# Altium PCB Advanced Clock.PcbDoc (part 2 of 7)
Units mil, origin at the board's own origin, x right, y up, seen from the top; angles counter-clockwise.
Board outline 3854 x 3880 mil, 2 copper layers (Top Layer, Bottom Layer); 117 components, 90 nets, 504 pads, 209 vias.
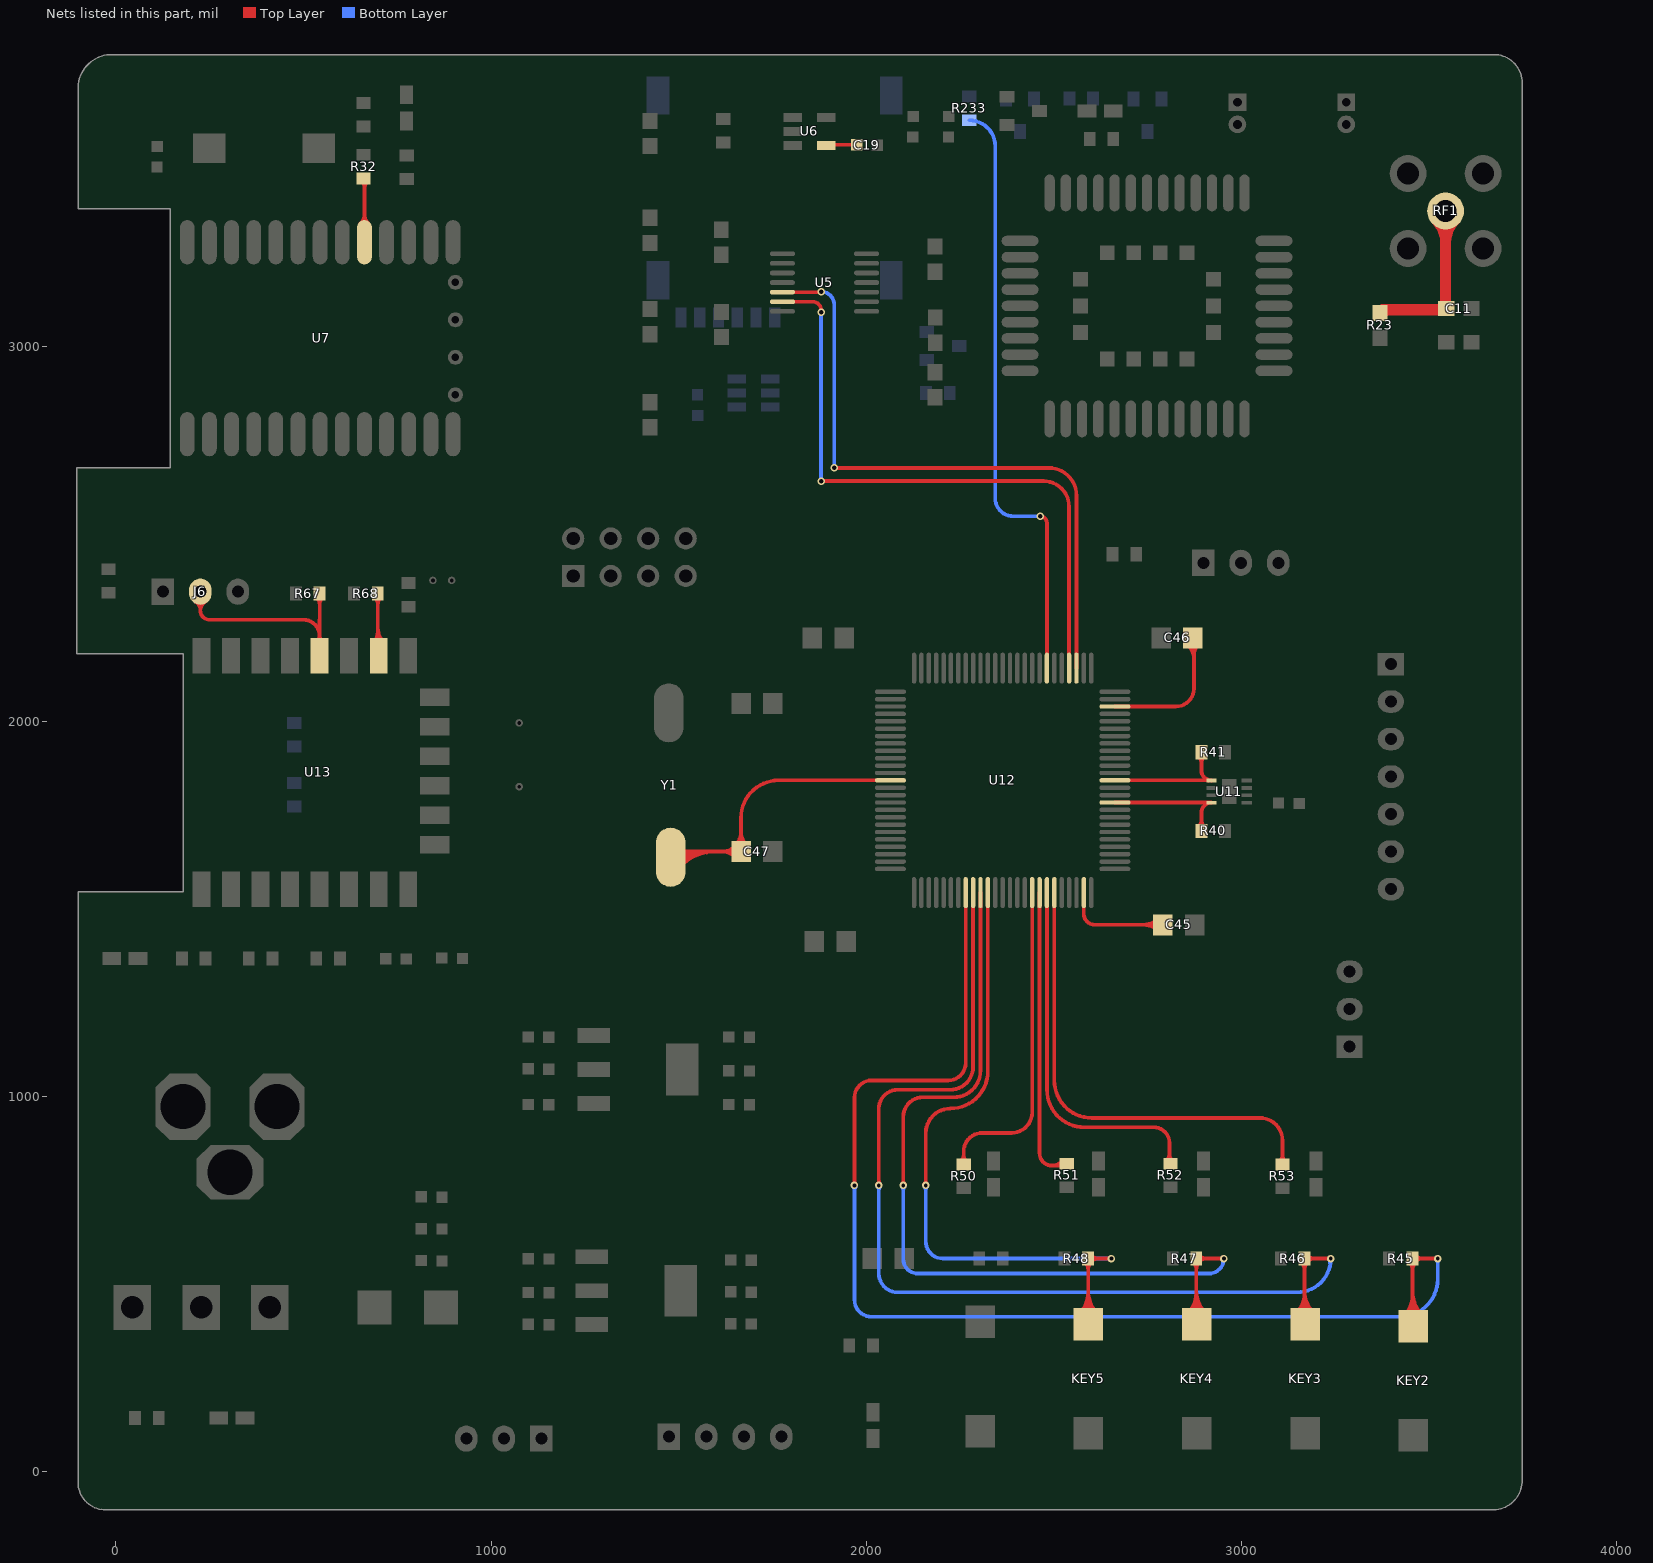
[diagram p2: the nets of this part, all layers, seen from the top]

## Via types
v1: diameter 20, hole 12, Top Layer to Bottom Layer, 133 vias
v2: diameter 20, hole 10, Top Layer to Bottom Layer, 30 vias
v3: diameter 15, hole 7, Top Layer to Bottom Layer, 26 vias
v4: diameter 30, hole 20, Top Layer to Bottom Layer, 11 vias
v5: diameter 138, hole 137.8, Top Layer to Bottom Layer, 4 vias
v6: diameter 50, hole 30, Top Layer to Bottom Layer, 4 vias
v7: diameter 40, hole 20, Top Layer to Bottom Layer, 1 vias

## Nets (pads, with @x,y where several pads share a name; then routed paths per layer and width w, separated by ;. In a path a pad name is that pad's centre, name@x,y a point inside that pad or via, vN(x,y) a via of type N, cw(c..) or ccw(c..) an arc to the next point about the centre after c; other vN are vias at no path point) (continued)
"GPIO 0": J6.2 R67.2 U13.4 | length 1435.2
  Top Layer w10: J6.2@225,2345 225,2295 ; U13.4@542.78,2174.13 542.78,2227.22 ; R67.2@542.99,2340 542.99,2270 542.78,2270 542.78,2227.22 ; J6.2@211.79,2318.77 cw(c197,2295) 225,2295 ; J6.2@211.79,2318.77 cw(c197,2295) 225,2295 ; J6.2@211.79,2318.77 cw(c197,2295) 225,2295 ; J6.2@211.79,2318.77 cw(c197,2295) 225,2295 ; J6.2@211.79,2318.77 cw(c197,2295) 225,2295 ; 225,2295 cw(c253,2295) J6.2@238.21,2318.77 ; 225,2295 cw(c253,2295) J6.2@238.21,2318.77 ; 225,2295 cw(c253,2295) J6.2@238.21,2318.77 ; 225,2295 cw(c253,2295) J6.2@238.21,2318.77 ; 225,2295 cw(c253,2295) J6.2@238.21,2318.77 ; 225,2295 ccw(c250,2295) 250,2270 500,2270 cw(c500,2227.22) 542.78,2227.22 ; U13.4@534.79,2214.57 ccw(c528.77,2227.22) 542.78,2227.22 ; U13.4@534.79,2214.57 ccw(c528.77,2227.22) 542.78,2227.22 ; U13.4@534.79,2214.57 ccw(c528.77,2227.22) 542.78,2227.22 ; U13.4@534.79,2214.57 ccw(c528.77,2227.22) 542.78,2227.22 ; U13.4@534.79,2214.57 ccw(c528.77,2227.22) 542.78,2227.22 ; U13.4@534.79,2214.57 ccw(c528.77,2227.22) 542.78,2227.22 ; U13.4@534.79,2214.57 ccw(c528.77,2227.22) 542.78,2227.22 ; U13.4@534.79,2214.57 ccw(c528.77,2227.22) 542.78,2227.22 ; R67.2@535.39,2329.15 cw(c517.04,2310.8) 542.99,2310.8 ; R67.2@535.39,2329.15 cw(c517.04,2310.8) 542.99,2310.8 ; R67.2@535.39,2329.15 cw(c517.04,2310.8) 542.99,2310.8 ; R67.2@535.39,2329.15 cw(c517.04,2310.8) 542.99,2310.8 ; R67.2@535.39,2329.15 cw(c517.04,2310.8) 542.99,2310.8 ; R67.2@535.39,2329.15 cw(c517.04,2310.8) 542.99,2310.8 ; R67.2@535.39,2329.15 cw(c517.04,2310.8) 542.99,2310.8 ; R67.2@535.39,2329.15 cw(c517.04,2310.8) 542.99,2310.8 ; 542.78,2227.22 ccw(c556.79,2227.22) U13.4@550.77,2214.57 ; 542.78,2227.22 ccw(c556.79,2227.22) U13.4@550.77,2214.57 ; 542.78,2227.22 ccw(c556.79,2227.22) U13.4@550.77,2214.57 ; 542.78,2227.22 ccw(c556.79,2227.22) U13.4@550.77,2214.57 ; 542.78,2227.22 ccw(c556.79,2227.22) U13.4@550.77,2214.57 ; 542.78,2227.22 ccw(c556.79,2227.22) U13.4@550.77,2214.57 ; 542.78,2227.22 ccw(c556.79,2227.22) U13.4@550.77,2214.57 ; 542.78,2227.22 ccw(c556.79,2227.22) U13.4@550.77,2214.57 ; 542.99,2310.8 cw(c568.94,2310.8) R67.2@550.59,2329.15 ; 542.99,2310.8 cw(c568.94,2310.8) R67.2@550.59,2329.15 ; 542.99,2310.8 cw(c568.94,2310.8) R67.2@550.59,2329.15 ; 542.99,2310.8 cw(c568.94,2310.8) R67.2@550.59,2329.15 ; 542.99,2310.8 cw(c568.94,2310.8) R67.2@550.59,2329.15 ; 542.99,2310.8 cw(c568.94,2310.8) R67.2@550.59,2329.15 ; 542.99,2310.8 cw(c568.94,2310.8) R67.2@550.59,2329.15 ; 542.99,2310.8 cw(c568.94,2310.8) R67.2@550.59,2329.15
"GPIO 15": R68.2 U13.2 | length 961.2
  Top Layer w10: R68.2@697.99,2340 697.99,2176.39 ccw(c700.26,2176.39) U13.2@700.26,2174.13 ccw(c700.26,2175.86) U13.2@701.99,2175.86 ; U13.2@687.09,2210.92 ccw(c660.78,2237.23) 697.99,2237.23 ; U13.2@687.09,2210.92 ccw(c660.78,2237.23) 697.99,2237.23 ; U13.2@687.09,2210.92 ccw(c660.78,2237.23) 697.99,2237.23 ; U13.2@687.09,2210.92 ccw(c660.78,2237.23) 697.99,2237.23 ; U13.2@687.09,2210.92 ccw(c660.78,2237.23) 697.99,2237.23 ; R68.2@690.39,2329.15 cw(c672.04,2310.8) 697.99,2310.8 ; R68.2@690.39,2329.15 cw(c672.04,2310.8) 697.99,2310.8 ; R68.2@690.39,2329.15 cw(c672.04,2310.8) 697.99,2310.8 ; R68.2@690.39,2329.15 cw(c672.04,2310.8) 697.99,2310.8 ; R68.2@690.39,2329.15 cw(c672.04,2310.8) 697.99,2310.8 ; R68.2@690.39,2329.15 cw(c672.04,2310.8) 697.99,2310.8 ; R68.2@690.39,2329.15 cw(c672.04,2310.8) 697.99,2310.8 ; R68.2@690.39,2329.15 cw(c672.04,2310.8) 697.99,2310.8 ; 697.99,2224.04 ccw(c726.55,2224.04) U13.2@706.36,2203.84 ; 697.99,2224.04 ccw(c726.55,2224.04) U13.2@706.36,2203.84 ; 697.99,2224.04 ccw(c726.55,2224.04) U13.2@706.36,2203.84 ; 697.99,2224.04 ccw(c726.55,2224.04) U13.2@706.36,2203.84 ; 697.99,2224.04 ccw(c726.55,2224.04) U13.2@706.36,2203.84 ; 697.99,2248.18 ccw(c750.69,2248.18) U13.2@713.43,2210.92 ; 697.99,2248.18 ccw(c750.69,2248.18) U13.2@713.43,2210.92 ; 697.99,2248.18 ccw(c750.69,2248.18) U13.2@713.43,2210.92 ; 697.99,2248.18 ccw(c750.69,2248.18) U13.2@713.43,2210.92 ; 697.99,2248.18 ccw(c750.69,2248.18) U13.2@713.43,2210.92 ; 697.99,2310.8 cw(c723.94,2310.8) R68.2@705.59,2329.15 ; 697.99,2310.8 cw(c723.94,2310.8) R68.2@705.59,2329.15 ; 697.99,2310.8 cw(c723.94,2310.8) R68.2@705.59,2329.15 ; 697.99,2310.8 cw(c723.94,2310.8) R68.2@705.59,2329.15 ; 697.99,2310.8 cw(c723.94,2310.8) R68.2@705.59,2329.15 ; 697.99,2310.8 cw(c723.94,2310.8) R68.2@705.59,2329.15 ; 697.99,2310.8 cw(c723.94,2310.8) R68.2@705.59,2329.15 ; 697.99,2310.8 cw(c723.94,2310.8) R68.2@705.59,2329.15
IIC_SCL: R40.1 U11.4 U12.60 | length 673.5
  Top Layer w10: U12.60@2663.21,1782.94 U11.4@2920.08,1782.94 ; R40.1@2894,1707 2894,1755.72 cw(c2920.65,1755.72) U11.4@2920.65,1782.38 ; R40.1@2886.4,1717.85 ccw(c2868.05,1736.2) 2894,1736.2 ; R40.1@2886.4,1717.85 ccw(c2868.05,1736.2) 2894,1736.2 ; R40.1@2886.4,1717.85 ccw(c2868.05,1736.2) 2894,1736.2 ; R40.1@2886.4,1717.85 ccw(c2868.05,1736.2) 2894,1736.2 ; R40.1@2886.4,1717.85 ccw(c2868.05,1736.2) 2894,1736.2 ; R40.1@2886.4,1717.85 ccw(c2868.05,1736.2) 2894,1736.2 ; R40.1@2886.4,1717.85 ccw(c2868.05,1736.2) 2894,1736.2 ; R40.1@2886.4,1717.85 ccw(c2868.05,1736.2) 2894,1736.2 ; 2894,1736.2 ccw(c2919.95,1736.2) R40.1@2901.6,1717.85 ; 2894,1736.2 ccw(c2919.95,1736.2) R40.1@2901.6,1717.85 ; 2894,1736.2 ccw(c2919.95,1736.2) R40.1@2901.6,1717.85 ; 2894,1736.2 ccw(c2919.95,1736.2) R40.1@2901.6,1717.85 ; 2894,1736.2 ccw(c2919.95,1736.2) R40.1@2901.6,1717.85 ; 2894,1736.2 ccw(c2919.95,1736.2) R40.1@2901.6,1717.85 ; 2894,1736.2 ccw(c2919.95,1736.2) R40.1@2901.6,1717.85 ; 2894,1736.2 ccw(c2919.95,1736.2) R40.1@2901.6,1717.85
IIC_SDA: R41.1 U11.1 U12.63 | length 679.7
  Top Layer w10: U12.63@2663.21,1842 U11.1@2915.2,1842 ; R41.1@2894,1917 2894,1868.1 ccw(c2920.66,1868.1) U11.1@2915.2,1842 ; U11.1@2920.66,1841.43 2920.1,1842 U11.1@2915.2,1842 ; R41.1@2886.4,1906.15 cw(c2868.05,1887.8) 2894,1887.8 ; R41.1@2886.4,1906.15 cw(c2868.05,1887.8) 2894,1887.8 ; R41.1@2886.4,1906.15 cw(c2868.05,1887.8) 2894,1887.8 ; R41.1@2886.4,1906.15 cw(c2868.05,1887.8) 2894,1887.8 ; R41.1@2886.4,1906.15 cw(c2868.05,1887.8) 2894,1887.8 ; R41.1@2886.4,1906.15 cw(c2868.05,1887.8) 2894,1887.8 ; R41.1@2886.4,1906.15 cw(c2868.05,1887.8) 2894,1887.8 ; R41.1@2886.4,1906.15 cw(c2868.05,1887.8) 2894,1887.8 ; 2894,1887.8 cw(c2919.95,1887.8) R41.1@2901.6,1906.15 ; 2894,1887.8 cw(c2919.95,1887.8) R41.1@2901.6,1906.15 ; 2894,1887.8 cw(c2919.95,1887.8) R41.1@2901.6,1906.15 ; 2894,1887.8 cw(c2919.95,1887.8) R41.1@2901.6,1906.15 ; 2894,1887.8 cw(c2919.95,1887.8) R41.1@2901.6,1906.15 ; 2894,1887.8 cw(c2919.95,1887.8) R41.1@2901.6,1906.15 ; 2894,1887.8 cw(c2919.95,1887.8) R41.1@2901.6,1906.15 ; 2894,1887.8 cw(c2919.95,1887.8) R41.1@2901.6,1906.15 ; U11.1@2908.5,1845.39 cw(c2905.44,1839.34) 2911.88,1841.46 ccw(c2905.44,1839.34) U11.1@2908.5,1845.39
KEY: R32.2 U7.18 | length 776.1
  Top Layer w10: R32.2@660,3447.01 cw(c660,3444.57) 662.44,3444.57 U7.18@662.44,3276.81 ; U7.18@652.06,3326.56 ccw(c626.99,3351.63) 662.44,3351.63 ; U7.18@652.06,3326.56 ccw(c626.99,3351.63) 662.44,3351.63 ; U7.18@652.06,3326.56 ccw(c626.99,3351.63) 662.44,3351.63 ; U7.18@652.06,3326.56 ccw(c626.99,3351.63) 662.44,3351.63 ; U7.18@652.06,3326.56 ccw(c626.99,3351.63) 662.44,3351.63 ; R32.2@655.65,3439.41 cw(c639.25,3423.01) 662.44,3423.01 ; R32.2@655.65,3439.41 cw(c639.25,3423.01) 662.44,3423.01 ; R32.2@655.65,3439.41 cw(c639.25,3423.01) 662.44,3423.01 ; R32.2@655.65,3439.41 cw(c639.25,3423.01) 662.44,3423.01 ; R32.2@655.65,3439.41 cw(c639.25,3423.01) 662.44,3423.01 ; R32.2@655.65,3439.41 cw(c639.25,3423.01) 662.44,3423.01 ; R32.2@655.65,3439.41 cw(c639.25,3423.01) 662.44,3423.01 ; R32.2@655.65,3439.41 cw(c639.25,3423.01) 662.44,3423.01 ; 662.44,3351.63 ccw(c697.89,3351.63) U7.18@672.82,3326.56 ; 662.44,3351.63 ccw(c697.89,3351.63) U7.18@672.82,3326.56 ; 662.44,3351.63 ccw(c697.89,3351.63) U7.18@672.82,3326.56 ; 662.44,3351.63 ccw(c697.89,3351.63) U7.18@672.82,3326.56 ; 662.44,3351.63 ccw(c697.89,3351.63) U7.18@672.82,3326.56 ; 662.44,3419.11 cw(c691.14,3419.11) R32.2@670.85,3439.41 ; 662.44,3419.11 cw(c691.14,3419.11) R32.2@670.85,3439.41 ; 662.44,3419.11 cw(c691.14,3419.11) R32.2@670.85,3439.41 ; 662.44,3419.11 cw(c691.14,3419.11) R32.2@670.85,3439.41 ; 662.44,3419.11 cw(c691.14,3419.11) R32.2@670.85,3439.41 ; 662.44,3419.11 cw(c691.14,3419.11) R32.2@670.85,3439.41 ; 662.44,3419.11 cw(c691.14,3419.11) R32.2@670.85,3439.41 ; 662.44,3419.11 cw(c691.14,3419.11) R32.2@670.85,3439.41
KEY2: KEY5.1 R48.2 U12.36 | length 4155.8
  Top Layer w10: v2(2159,762) 2159,901.37 cw(c2224.63,901.37) 2224.63,967 ccw(c2224.63,1067) 2324.63,1067 U12.36@2324.63,1542.79 ; KEY5.1@2592.75,392 cw(c2592.75,392.76) 2591.99,392.76 R48.2@2591.99,567 v2(2654,567) ; v2@2155.46,765.54 ccw(c2146.93,774.07) 2159,774.07 ; v2@2155.46,765.54 ccw(c2146.93,774.07) 2159,774.07 ; v2@2155.46,765.54 ccw(c2146.93,774.07) 2159,774.07 ; v2@2155.46,765.54 ccw(c2146.93,774.07) 2159,774.07 ; v2@2155.46,765.54 ccw(c2146.93,774.07) 2159,774.07 ; v2@2155.46,765.54 ccw(c2146.93,774.07) 2159,774.07 ; v2@2155.46,765.54 ccw(c2146.93,774.07) 2159,774.07 ; v2@2155.46,765.54 ccw(c2146.93,774.07) 2159,774.07 ; 2159,774.07 ccw(c2171.07,774.07) v2@2162.54,765.54 ; 2159,774.07 ccw(c2171.07,774.07) v2@2162.54,765.54 ; 2159,774.07 ccw(c2171.07,774.07) v2@2162.54,765.54 ; 2159,774.07 ccw(c2171.07,774.07) v2@2162.54,765.54 ; 2159,774.07 ccw(c2171.07,774.07) v2@2162.54,765.54 ; 2159,774.07 ccw(c2171.07,774.07) v2@2162.54,765.54 ; 2159,774.07 ccw(c2171.07,774.07) v2@2162.54,765.54 ; 2159,774.07 ccw(c2171.07,774.07) v2@2162.54,765.54 ; KEY5.1@2568.45,420.24 ccw(c2511.6,477.08) 2591.99,477.08 ; KEY5.1@2568.45,420.24 ccw(c2511.6,477.08) 2591.99,477.08 ; KEY5.1@2568.45,420.24 ccw(c2511.6,477.08) 2591.99,477.08 ; KEY5.1@2568.45,420.24 ccw(c2511.6,477.08) 2591.99,477.08 ; KEY5.1@2568.45,420.24 ccw(c2511.6,477.08) 2591.99,477.08 ; KEY5.1@2575.52,413.17 ccw(c2535.75,452.94) 2591.99,452.94 ; KEY5.1@2575.52,413.17 ccw(c2535.75,452.94) 2591.99,452.94 ; KEY5.1@2575.52,413.17 ccw(c2535.75,452.94) 2591.99,452.94 ; KEY5.1@2575.52,413.17 ccw(c2535.75,452.94) 2591.99,452.94 ; KEY5.1@2575.52,413.17 ccw(c2535.75,452.94) 2591.99,452.94 ; R48.2@2584.39,556.15 cw(c2566.04,537.8) 2591.99,537.8 ; R48.2@2584.39,556.15 cw(c2566.04,537.8) 2591.99,537.8 ; R48.2@2584.39,556.15 cw(c2566.04,537.8) 2591.99,537.8 ; R48.2@2584.39,556.15 cw(c2566.04,537.8) 2591.99,537.8 ; R48.2@2584.39,556.15 cw(c2566.04,537.8) 2591.99,537.8 ; R48.2@2584.39,556.15 cw(c2566.04,537.8) 2591.99,537.8 ; R48.2@2584.39,556.15 cw(c2566.04,537.8) 2591.99,537.8 ; R48.2@2584.39,556.15 cw(c2566.04,537.8) 2591.99,537.8 ; 2591.99,456.6 ccw(c2653.41,456.6) KEY5.1@2609.98,413.17 ; 2591.99,456.6 ccw(c2653.41,456.6) KEY5.1@2609.98,413.17 ; 2591.99,456.6 ccw(c2653.41,456.6) KEY5.1@2609.98,413.17 ; 2591.99,456.6 ccw(c2653.41,456.6) KEY5.1@2609.98,413.17 ; 2591.99,456.6 ccw(c2653.41,456.6) KEY5.1@2609.98,413.17 ; 2591.99,480.74 ccw(c2677.56,480.74) KEY5.1@2617.05,420.24 ; 2591.99,480.74 ccw(c2677.56,480.74) KEY5.1@2617.05,420.24 ; 2591.99,480.74 ccw(c2677.56,480.74) KEY5.1@2617.05,420.24 ; 2591.99,480.74 ccw(c2677.56,480.74) KEY5.1@2617.05,420.24 ; 2591.99,480.74 ccw(c2677.56,480.74) KEY5.1@2617.05,420.24 ; 2591.99,537.8 cw(c2617.94,537.8) R48.2@2599.59,556.15 ; 2591.99,537.8 cw(c2617.94,537.8) R48.2@2599.59,556.15 ; 2591.99,537.8 cw(c2617.94,537.8) R48.2@2599.59,556.15 ; 2591.99,537.8 cw(c2617.94,537.8) R48.2@2599.59,556.15 ; 2591.99,537.8 cw(c2617.94,537.8) R48.2@2599.59,556.15 ; 2591.99,537.8 cw(c2617.94,537.8) R48.2@2599.59,556.15 ; 2591.99,537.8 cw(c2617.94,537.8) R48.2@2599.59,556.15 ; 2591.99,537.8 cw(c2617.94,537.8) R48.2@2599.59,556.15 ; R48.2@2599.59,559.4 cw(c2617.94,541.05) 2617.94,567 ; R48.2@2599.59,559.4 cw(c2617.94,541.05) 2617.94,567 ; R48.2@2599.59,559.4 cw(c2617.94,541.05) 2617.94,567 ; R48.2@2599.59,559.4 cw(c2617.94,541.05) 2617.94,567 ; R48.2@2599.59,559.4 cw(c2617.94,541.05) 2617.94,567 ; R48.2@2599.59,559.4 cw(c2617.94,541.05) 2617.94,567 ; R48.2@2599.59,559.4 cw(c2617.94,541.05) 2617.94,567 ; R48.2@2599.59,559.4 cw(c2617.94,541.05) 2617.94,567 ; R48.2@2599.59,574.6 ccw(c2617.94,592.95) 2617.94,567 ; R48.2@2599.59,574.6 ccw(c2617.94,592.95) 2617.94,567 ; R48.2@2599.59,574.6 ccw(c2617.94,592.95) 2617.94,567 ; R48.2@2599.59,574.6 ccw(c2617.94,592.95) 2617.94,567 ; R48.2@2599.59,574.6 ccw(c2617.94,592.95) 2617.94,567 ; R48.2@2599.59,574.6 ccw(c2617.94,592.95) 2617.94,567 ; R48.2@2599.59,574.6 ccw(c2617.94,592.95) 2617.94,567 ; R48.2@2599.59,574.6 ccw(c2617.94,592.95) 2617.94,567 ; 2641.93,567 cw(c2641.93,554.93) v2@2650.46,563.46 ; 2641.93,567 ccw(c2641.93,579.07) v2@2650.46,570.54 ; 2641.93,567 cw(c2641.93,554.93) v2@2650.46,563.46 ; 2641.93,567 ccw(c2641.93,579.07) v2@2650.46,570.54 ; 2641.93,567 cw(c2641.93,554.93) v2@2650.46,563.46 ; 2641.93,567 ccw(c2641.93,579.07) v2@2650.46,570.54 ; 2641.93,567 cw(c2641.93,554.93) v2@2650.46,563.46 ; 2641.93,567 ccw(c2641.93,579.07) v2@2650.46,570.54 ; 2641.93,567 cw(c2641.93,554.93) v2@2650.46,563.46 ; 2641.93,567 ccw(c2641.93,579.07) v2@2650.46,570.54 ; 2641.93,567 cw(c2641.93,554.93) v2@2650.46,563.46 ; 2641.93,567 ccw(c2641.93,579.07) v2@2650.46,570.54 ; 2641.93,567 cw(c2641.93,554.93) v2@2650.46,563.46 ; 2641.93,567 ccw(c2641.93,579.07) v2@2650.46,570.54 ; 2641.93,567 cw(c2641.93,554.93) v2@2650.46,563.46 ; 2641.93,567 ccw(c2641.93,579.07) v2@2650.46,570.54
  Bottom Layer w10: v2(2159,762) 2159,612.81 ccw(c2204.81,612.81) 2204.81,567 v2(2654,567) ; v2@2155.46,758.46 cw(c2146.93,749.93) 2159,749.93 ; v2@2155.46,758.46 cw(c2146.93,749.93) 2159,749.93 ; v2@2155.46,758.46 cw(c2146.93,749.93) 2159,749.93 ; v2@2155.46,758.46 cw(c2146.93,749.93) 2159,749.93 ; v2@2155.46,758.46 cw(c2146.93,749.93) 2159,749.93 ; v2@2155.46,758.46 cw(c2146.93,749.93) 2159,749.93 ; v2@2155.46,758.46 cw(c2146.93,749.93) 2159,749.93 ; v2@2155.46,758.46 cw(c2146.93,749.93) 2159,749.93 ; 2159,749.93 cw(c2171.07,749.93) v2@2162.54,758.46 ; 2159,749.93 cw(c2171.07,749.93) v2@2162.54,758.46 ; 2159,749.93 cw(c2171.07,749.93) v2@2162.54,758.46 ; 2159,749.93 cw(c2171.07,749.93) v2@2162.54,758.46 ; 2159,749.93 cw(c2171.07,749.93) v2@2162.54,758.46 ; 2159,749.93 cw(c2171.07,749.93) v2@2162.54,758.46 ; 2159,749.93 cw(c2171.07,749.93) v2@2162.54,758.46 ; 2159,749.93 cw(c2171.07,749.93) v2@2162.54,758.46 ; 2641.93,567 cw(c2641.93,554.93) v2@2650.46,563.46 ; 2641.93,567 ccw(c2641.93,579.07) v2@2650.46,570.54 ; 2641.93,567 cw(c2641.93,554.93) v2@2650.46,563.46 ; 2641.93,567 ccw(c2641.93,579.07) v2@2650.46,570.54 ; 2641.93,567 cw(c2641.93,554.93) v2@2650.46,563.46 ; 2641.93,567 ccw(c2641.93,579.07) v2@2650.46,570.54 ; 2641.93,567 cw(c2641.93,554.93) v2@2650.46,563.46 ; 2641.93,567 ccw(c2641.93,579.07) v2@2650.46,570.54 ; 2641.93,567 cw(c2641.93,554.93) v2@2650.46,563.46 ; 2641.93,567 ccw(c2641.93,579.07) v2@2650.46,570.54 ; 2641.93,567 cw(c2641.93,554.93) v2@2650.46,563.46 ; 2641.93,567 ccw(c2641.93,579.07) v2@2650.46,570.54 ; 2641.93,567 cw(c2641.93,554.93) v2@2650.46,563.46 ; 2641.93,567 ccw(c2641.93,579.07) v2@2650.46,570.54 ; 2641.93,567 cw(c2641.93,554.93) v2@2650.46,563.46 ; 2641.93,567 ccw(c2641.93,579.07) v2@2650.46,570.54
KEY3: KEY4.1 R47.2 U12.35 | length 4595
  Top Layer w10: v2(2099,762) 2099,944.68 cw(c2151.32,944.68) 2151.32,997 2234,997 ccw(c2234,1067.94) 2304.94,1067.94 U12.35@2304.94,1542.79 ; KEY4.1@2881.5,392 cw(c2881.5,393.17) 2880.33,393.17 R47.2@2880.33,567 v2(2954,567) ; v2@2095.46,765.54 ccw(c2086.93,774.07) 2099,774.07 ; v2@2095.46,765.54 ccw(c2086.93,774.07) 2099,774.07 ; v2@2095.46,765.54 ccw(c2086.93,774.07) 2099,774.07 ; v2@2095.46,765.54 ccw(c2086.93,774.07) 2099,774.07 ; v2@2095.46,765.54 ccw(c2086.93,774.07) 2099,774.07 ; v2@2095.46,765.54 ccw(c2086.93,774.07) 2099,774.07 ; v2@2095.46,765.54 ccw(c2086.93,774.07) 2099,774.07 ; v2@2095.46,765.54 ccw(c2086.93,774.07) 2099,774.07 ; 2099,774.07 ccw(c2111.07,774.07) v2@2102.54,765.54 ; 2099,774.07 ccw(c2111.07,774.07) v2@2102.54,765.54 ; 2099,774.07 ccw(c2111.07,774.07) v2@2102.54,765.54 ; 2099,774.07 ccw(c2111.07,774.07) v2@2102.54,765.54 ; 2099,774.07 ccw(c2111.07,774.07) v2@2102.54,765.54 ; 2099,774.07 ccw(c2111.07,774.07) v2@2102.54,765.54 ; 2099,774.07 ccw(c2111.07,774.07) v2@2102.54,765.54 ; 2099,774.07 ccw(c2111.07,774.07) v2@2102.54,765.54 ; KEY4.1@2857.2,420.24 ccw(c2801.36,476.08) 2880.33,476.08 ; KEY4.1@2857.2,420.24 ccw(c2801.36,476.08) 2880.33,476.08 ; KEY4.1@2857.2,420.24 ccw(c2801.36,476.08) 2880.33,476.08 ; KEY4.1@2857.2,420.24 ccw(c2801.36,476.08) 2880.33,476.08 ; KEY4.1@2857.2,420.24 ccw(c2801.36,476.08) 2880.33,476.08 ; KEY4.1@2864.27,413.17 ccw(c2825.5,451.94) 2880.33,451.94 ; KEY4.1@2864.27,413.17 ccw(c2825.5,451.94) 2880.33,451.94 ; KEY4.1@2864.27,413.17 ccw(c2825.5,451.94) 2880.33,451.94 ; KEY4.1@2864.27,413.17 ccw(c2825.5,451.94) 2880.33,451.94 ; KEY4.1@2864.27,413.17 ccw(c2825.5,451.94) 2880.33,451.94 ; R47.2@2872.73,556.15 cw(c2854.38,537.8) 2880.33,537.8 ; R47.2@2872.73,556.15 cw(c2854.38,537.8) 2880.33,537.8 ; R47.2@2872.73,556.15 cw(c2854.38,537.8) 2880.33,537.8 ; R47.2@2872.73,556.15 cw(c2854.38,537.8) 2880.33,537.8 ; R47.2@2872.73,556.15 cw(c2854.38,537.8) 2880.33,537.8 ; R47.2@2872.73,556.15 cw(c2854.38,537.8) 2880.33,537.8 ; R47.2@2872.73,556.15 cw(c2854.38,537.8) 2880.33,537.8 ; R47.2@2872.73,556.15 cw(c2854.38,537.8) 2880.33,537.8 ; 2880.33,457.61 ccw(c2943.17,457.61) KEY4.1@2898.73,413.17 ; 2880.33,457.61 ccw(c2943.17,457.61) KEY4.1@2898.73,413.17 ; 2880.33,457.61 ccw(c2943.17,457.61) KEY4.1@2898.73,413.17 ; 2880.33,457.61 ccw(c2943.17,457.61) KEY4.1@2898.73,413.17 ; 2880.33,457.61 ccw(c2943.17,457.61) KEY4.1@2898.73,413.17 ; 2880.33,481.75 ccw(c2967.31,481.75) KEY4.1@2905.8,420.24 ; 2880.33,481.75 ccw(c2967.31,481.75) KEY4.1@2905.8,420.24 ; 2880.33,481.75 ccw(c2967.31,481.75) KEY4.1@2905.8,420.24 ; 2880.33,481.75 ccw(c2967.31,481.75) KEY4.1@2905.8,420.24 ; 2880.33,481.75 ccw(c2967.31,481.75) KEY4.1@2905.8,420.24 ; 2880.33,537.8 cw(c2906.27,537.8) R47.2@2887.93,556.15 ; 2880.33,537.8 cw(c2906.27,537.8) R47.2@2887.93,556.15 ; 2880.33,537.8 cw(c2906.27,537.8) R47.2@2887.93,556.15 ; 2880.33,537.8 cw(c2906.27,537.8) R47.2@2887.93,556.15 ; 2880.33,537.8 cw(c2906.27,537.8) R47.2@2887.93,556.15 ; 2880.33,537.8 cw(c2906.27,537.8) R47.2@2887.93,556.15 ; 2880.33,537.8 cw(c2906.27,537.8) R47.2@2887.93,556.15 ; 2880.33,537.8 cw(c2906.27,537.8) R47.2@2887.93,556.15 ; R47.2@2887.93,559.4 cw(c2906.27,541.05) 2906.27,567 ; R47.2@2887.93,559.4 cw(c2906.27,541.05) 2906.27,567 ; R47.2@2887.93,559.4 cw(c2906.27,541.05) 2906.27,567 ; R47.2@2887.93,559.4 cw(c2906.27,541.05) 2906.27,567 ; R47.2@2887.93,559.4 cw(c2906.27,541.05) 2906.27,567 ; R47.2@2887.93,559.4 cw(c2906.27,541.05) 2906.27,567 ; R47.2@2887.93,559.4 cw(c2906.27,541.05) 2906.27,567 ; R47.2@2887.93,559.4 cw(c2906.27,541.05) 2906.27,567 ; R47.2@2887.93,574.6 ccw(c2906.27,592.95) 2906.27,567 ; R47.2@2887.93,574.6 ccw(c2906.27,592.95) 2906.27,567 ; R47.2@2887.93,574.6 ccw(c2906.27,592.95) 2906.27,567 ; R47.2@2887.93,574.6 ccw(c2906.27,592.95) 2906.27,567 ; R47.2@2887.93,574.6 ccw(c2906.27,592.95) 2906.27,567 ; R47.2@2887.93,574.6 ccw(c2906.27,592.95) 2906.27,567 ; R47.2@2887.93,574.6 ccw(c2906.27,592.95) 2906.27,567 ; R47.2@2887.93,574.6 ccw(c2906.27,592.95) 2906.27,567 ; 2941.93,567 cw(c2941.93,554.93) v2@2950.46,563.46 ; 2941.93,567 ccw(c2941.93,579.07) v2@2950.46,570.54 ; 2941.93,567 cw(c2941.93,554.93) v2@2950.46,563.46 ; 2941.93,567 ccw(c2941.93,579.07) v2@2950.46,570.54 ; 2941.93,567 cw(c2941.93,554.93) v2@2950.46,563.46 ; 2941.93,567 ccw(c2941.93,579.07) v2@2950.46,570.54 ; 2941.93,567 cw(c2941.93,554.93) v2@2950.46,563.46 ; 2941.93,567 ccw(c2941.93,579.07) v2@2950.46,570.54 ; 2941.93,567 cw(c2941.93,554.93) v2@2950.46,563.46 ; 2941.93,567 ccw(c2941.93,579.07) v2@2950.46,570.54 ; 2941.93,567 cw(c2941.93,554.93) v2@2950.46,563.46 ; 2941.93,567 ccw(c2941.93,579.07) v2@2950.46,570.54 ; 2941.93,567 cw(c2941.93,554.93) v2@2950.46,563.46 ; 2941.93,567 ccw(c2941.93,579.07) v2@2950.46,570.54 ; 2941.93,567 cw(c2941.93,554.93) v2@2950.46,563.46 ; 2941.93,567 ccw(c2941.93,579.07) v2@2950.46,570.54
  Bottom Layer w10: v2(2099,762) 2099,566.14 ccw(c2138.14,566.14) 2138.14,527 2914,527 ccw(c2914,567) v2(2954,567) ; v2@2095.46,758.46 cw(c2086.93,749.93) 2099,749.93 ; v2@2095.46,758.46 cw(c2086.93,749.93) 2099,749.93 ; v2@2095.46,758.46 cw(c2086.93,749.93) 2099,749.93 ; v2@2095.46,758.46 cw(c2086.93,749.93) 2099,749.93 ; v2@2095.46,758.46 cw(c2086.93,749.93) 2099,749.93 ; v2@2095.46,758.46 cw(c2086.93,749.93) 2099,749.93 ; v2@2095.46,758.46 cw(c2086.93,749.93) 2099,749.93 ; v2@2095.46,758.46 cw(c2086.93,749.93) 2099,749.93 ; 2099,749.93 cw(c2111.07,749.93) v2@2102.54,758.46 ; 2099,749.93 cw(c2111.07,749.93) v2@2102.54,758.46 ; 2099,749.93 cw(c2111.07,749.93) v2@2102.54,758.46 ; 2099,749.93 cw(c2111.07,749.93) v2@2102.54,758.46 ; 2099,749.93 cw(c2111.07,749.93) v2@2102.54,758.46 ; 2099,749.93 cw(c2111.07,749.93) v2@2102.54,758.46 ; 2099,749.93 cw(c2111.07,749.93) v2@2102.54,758.46 ; 2099,749.93 cw(c2111.07,749.93) v2@2102.54,758.46 ; v2@2949.67,564.5 cw(c2939.22,558.46) 2950.88,555.34 ; v2@2949.67,564.5 cw(c2939.22,558.46) 2950.88,555.34 ; v2@2949.67,564.5 cw(c2939.22,558.46) 2950.88,555.34 ; v2@2949.67,564.5 cw(c2939.22,558.46) 2950.88,555.34 ; v2@2949.67,564.5 cw(c2939.22,558.46) 2950.88,555.34 ; 2950.88,555.34 cw(c2962.54,552.22) v2@2956.5,562.67 ; 2950.88,555.34 cw(c2962.54,552.22) v2@2956.5,562.67 ; 2950.88,555.34 cw(c2962.54,552.22) v2@2956.5,562.67 ; 2950.88,555.34 cw(c2962.54,552.22) v2@2956.5,562.67 ; 2950.88,555.34 cw(c2962.54,552.22) v2@2956.5,562.67
KEY4: KEY3.1 R46.2 U12.34 | length 5071.3
  Top Layer w10: v2(2034,762) 2034,967 cw(c2084,967) 2084,1017 2224,1017 ccw(c2224,1078.26) 2285.26,1078.26 U12.34@2285.26,1542.79 ; KEY3.1@3170.25,392 cw(c3170.25,393.59) 3168.66,393.59 R46.2@3168.66,567 v2(3239,567) ; v2@2030.46,765.54 ccw(c2021.93,774.07) 2034,774.07 ; v2@2030.46,765.54 ccw(c2021.93,774.07) 2034,774.07 ; v2@2030.46,765.54 ccw(c2021.93,774.07) 2034,774.07 ; v2@2030.46,765.54 ccw(c2021.93,774.07) 2034,774.07 ; v2@2030.46,765.54 ccw(c2021.93,774.07) 2034,774.07 ; v2@2030.46,765.54 ccw(c2021.93,774.07) 2034,774.07 ; v2@2030.46,765.54 ccw(c2021.93,774.07) 2034,774.07 ; v2@2030.46,765.54 ccw(c2021.93,774.07) 2034,774.07 ; 2034,774.07 ccw(c2046.07,774.07) v2@2037.54,765.54 ; 2034,774.07 ccw(c2046.07,774.07) v2@2037.54,765.54 ; 2034,774.07 ccw(c2046.07,774.07) v2@2037.54,765.54 ; 2034,774.07 ccw(c2046.07,774.07) v2@2037.54,765.54 ; 2034,774.07 ccw(c2046.07,774.07) v2@2037.54,765.54 ; 2034,774.07 ccw(c2046.07,774.07) v2@2037.54,765.54 ; 2034,774.07 ccw(c2046.07,774.07) v2@2037.54,765.54 ; 2034,774.07 ccw(c2046.07,774.07) v2@2037.54,765.54 ; KEY3.1@3145.95,420.24 ccw(c3091.12,475.07) 3168.66,475.07 ; KEY3.1@3145.95,420.24 ccw(c3091.12,475.07) 3168.66,475.07 ; KEY3.1@3145.95,420.24 ccw(c3091.12,475.07) 3168.66,475.07 ; KEY3.1@3145.95,420.24 ccw(c3091.12,475.07) 3168.66,475.07 ; KEY3.1@3145.95,420.24 ccw(c3091.12,475.07) 3168.66,475.07 ; KEY3.1@3153.02,413.17 ccw(c3115.26,450.93) 3168.66,450.93 ; KEY3.1@3153.02,413.17 ccw(c3115.26,450.93) 3168.66,450.93 ; KEY3.1@3153.02,413.17 ccw(c3115.26,450.93) 3168.66,450.93 ; KEY3.1@3153.02,413.17 ccw(c3115.26,450.93) 3168.66,450.93 ; KEY3.1@3153.02,413.17 ccw(c3115.26,450.93) 3168.66,450.93 ; R46.2@3161.06,556.15 cw(c3142.71,537.8) 3168.66,537.8 ; R46.2@3161.06,556.15 cw(c3142.71,537.8) 3168.66,537.8 ; R46.2@3161.06,556.15 cw(c3142.71,537.8) 3168.66,537.8 ; R46.2@3161.06,556.15 cw(c3142.71,537.8) 3168.66,537.8 ; R46.2@3161.06,556.15 cw(c3142.71,537.8) 3168.66,537.8 ; R46.2@3161.06,556.15 cw(c3142.71,537.8) 3168.66,537.8 ; R46.2@3161.06,556.15 cw(c3142.71,537.8) 3168.66,537.8 ; R46.2@3161.06,556.15 cw(c3142.71,537.8) 3168.66,537.8 ; 3168.66,458.61 ccw(c3232.93,458.61) KEY3.1@3187.48,413.17 ; 3168.66,458.61 ccw(c3232.93,458.61) KEY3.1@3187.48,413.17 ; 3168.66,458.61 ccw(c3232.93,458.61) KEY3.1@3187.48,413.17 ; 3168.66,458.61 ccw(c3232.93,458.61) KEY3.1@3187.48,413.17 ; 3168.66,458.61 ccw(c3232.93,458.61) KEY3.1@3187.48,413.17 ; 3168.66,482.76 ccw(c3257.07,482.76) KEY3.1@3194.55,420.24 ; 3168.66,482.76 ccw(c3257.07,482.76) KEY3.1@3194.55,420.24 ; 3168.66,482.76 ccw(c3257.07,482.76) KEY3.1@3194.55,420.24 ; 3168.66,482.76 ccw(c3257.07,482.76) KEY3.1@3194.55,420.24 ; 3168.66,482.76 ccw(c3257.07,482.76) KEY3.1@3194.55,420.24 ; 3168.66,537.8 cw(c3194.61,537.8) R46.2@3176.26,556.15 ; 3168.66,537.8 cw(c3194.61,537.8) R46.2@3176.26,556.15 ; 3168.66,537.8 cw(c3194.61,537.8) R46.2@3176.26,556.15 ; 3168.66,537.8 cw(c3194.61,537.8) R46.2@3176.26,556.15 ; 3168.66,537.8 cw(c3194.61,537.8) R46.2@3176.26,556.15 ; 3168.66,537.8 cw(c3194.61,537.8) R46.2@3176.26,556.15 ; 3168.66,537.8 cw(c3194.61,537.8) R46.2@3176.26,556.15 ; 3168.66,537.8 cw(c3194.61,537.8) R46.2@3176.26,556.15 ; R46.2@3176.26,559.4 cw(c3194.61,541.05) 3194.61,567 ; R46.2@3176.26,559.4 cw(c3194.61,541.05) 3194.61,567 ; R46.2@3176.26,559.4 cw(c3194.61,541.05) 3194.61,567 ; R46.2@3176.26,559.4 cw(c3194.61,541.05) 3194.61,567 ; R46.2@3176.26,559.4 cw(c3194.61,541.05) 3194.61,567 ; R46.2@3176.26,559.4 cw(c3194.61,541.05) 3194.61,567 ; R46.2@3176.26,559.4 cw(c3194.61,541.05) 3194.61,567 ; R46.2@3176.26,559.4 cw(c3194.61,541.05) 3194.61,567 ; R46.2@3176.26,574.6 ccw(c3194.61,592.95) 3194.61,567 ; R46.2@3176.26,574.6 ccw(c3194.61,592.95) 3194.61,567 ; R46.2@3176.26,574.6 ccw(c3194.61,592.95) 3194.61,567 ; R46.2@3176.26,574.6 ccw(c3194.61,592.95) 3194.61,567 ; R46.2@3176.26,574.6 ccw(c3194.61,592.95) 3194.61,567 ; R46.2@3176.26,574.6 ccw(c3194.61,592.95) 3194.61,567 ; R46.2@3176.26,574.6 ccw(c3194.61,592.95) 3194.61,567 ; R46.2@3176.26,574.6 ccw(c3194.61,592.95) 3194.61,567 ; 3226.93,567 cw(c3226.93,554.93) v2@3235.46,563.46 ; 3226.93,567 ccw(c3226.93,579.07) v2@3235.46,570.54 ; 3226.93,567 cw(c3226.93,554.93) v2@3235.46,563.46 ; 3226.93,567 ccw(c3226.93,579.07) v2@3235.46,570.54 ; 3226.93,567 cw(c3226.93,554.93) v2@3235.46,563.46 ; 3226.93,567 ccw(c3226.93,579.07) v2@3235.46,570.54 ; 3226.93,567 cw(c3226.93,554.93) v2@3235.46,563.46 ; 3226.93,567 ccw(c3226.93,579.07) v2@3235.46,570.54 ; 3226.93,567 cw(c3226.93,554.93) v2@3235.46,563.46 ; 3226.93,567 ccw(c3226.93,579.07) v2@3235.46,570.54 ; 3226.93,567 cw(c3226.93,554.93) v2@3235.46,563.46 ; 3226.93,567 ccw(c3226.93,579.07) v2@3235.46,570.54 ; 3226.93,567 cw(c3226.93,554.93) v2@3235.46,563.46 ; 3226.93,567 ccw(c3226.93,579.07) v2@3235.46,570.54 ; 3226.93,567 cw(c3226.93,554.93) v2@3235.46,563.46 ; 3226.93,567 ccw(c3226.93,579.07) v2@3235.46,570.54
  Bottom Layer w10: v2@2034,767 v2(2034,762) 2034,527 ccw(c2084,527) 2084,477 3149,477 ccw(c3149,567) v2(3239,567) ; v2@2030.46,758.46 cw(c2021.93,749.93) 2034,749.93 ; v2@2030.46,758.46 cw(c2021.93,749.93) 2034,749.93 ; v2@2030.46,758.46 cw(c2021.93,749.93) 2034,749.93 ; v2@2030.46,758.46 cw(c2021.93,749.93) 2034,749.93 ; v2@2030.46,758.46 cw(c2021.93,749.93) 2034,749.93 ; v2@2030.46,758.46 cw(c2021.93,749.93) 2034,749.93 ; v2@2030.46,758.46 cw(c2021.93,749.93) 2034,749.93 ; v2@2030.46,758.46 cw(c2021.93,749.93) 2034,749.93 ; 2034,749.93 cw(c2046.07,749.93) v2@2037.54,758.46 ; 2034,749.93 cw(c2046.07,749.93) v2@2037.54,758.46 ; 2034,749.93 cw(c2046.07,749.93) v2@2037.54,758.46 ; 2034,749.93 cw(c2046.07,749.93) v2@2037.54,758.46 ; 2034,749.93 cw(c2046.07,749.93) v2@2037.54,758.46 ; 2034,749.93 cw(c2046.07,749.93) v2@2037.54,758.46 ; 2034,749.93 cw(c2046.07,749.93) v2@2037.54,758.46 ; 2034,749.93 cw(c2046.07,749.93) v2@2037.54,758.46 ; v2@3234.77,564.34 cw(c3224.55,557.91) 3236.32,555.23 ; v2@3234.77,564.34 cw(c3224.55,557.91) 3236.32,555.23 ; v2@3234.77,564.34 cw(c3224.55,557.91) 3236.32,555.23 ; v2@3234.77,564.34 cw(c3224.55,557.91) 3236.32,555.23 ; v2@3234.77,564.34 cw(c3224.55,557.91) 3236.32,555.23 ; 3236.32,555.23 cw(c3248.09,552.55) v2@3241.66,562.77 ; 3236.32,555.23 cw(c3248.09,552.55) v2@3241.66,562.77 ; 3236.32,555.23 cw(c3248.09,552.55) v2@3241.66,562.77 ; 3236.32,555.23 cw(c3248.09,552.55) v2@3241.66,562.77 ; 3236.32,555.23 cw(c3248.09,552.55) v2@3241.66,562.77
KEY5: KEY2.1 R45.2 U12.33 | length 5824.5
  Top Layer w10: v2(1969,762) 1969,996.19 cw(c2014.81,996.19) 2014.81,1042 2219,1042 ccw(c2219,1088.57) 2265.57,1088.57 U12.33@2265.57,1542.79 ; KEY2.1@3459,387 cw(c3459,389.01) 3456.99,389.01 R45.2@3456.99,567 v2(3524,567) ; v2@1965.46,765.54 ccw(c1956.93,774.07) 1969,774.07 ; v2@1965.46,765.54 ccw(c1956.93,774.07) 1969,774.07 ; v2@1965.46,765.54 ccw(c1956.93,774.07) 1969,774.07 ; v2@1965.46,765.54 ccw(c1956.93,774.07) 1969,774.07 ; v2@1965.46,765.54 ccw(c1956.93,774.07) 1969,774.07 ; v2@1965.46,765.54 ccw(c1956.93,774.07) 1969,774.07 ; v2@1965.46,765.54 ccw(c1956.93,774.07) 1969,774.07 ; v2@1965.46,765.54 ccw(c1956.93,774.07) 1969,774.07 ; 1969,774.07 ccw(c1981.07,774.07) v2@1972.54,765.54 ; 1969,774.07 ccw(c1981.07,774.07) v2@1972.54,765.54 ; 1969,774.07 ccw(c1981.07,774.07) v2@1972.54,765.54 ; 1969,774.07 ccw(c1981.07,774.07) v2@1972.54,765.54 ; 1969,774.07 ccw(c1981.07,774.07) v2@1972.54,765.54 ; 1969,774.07 ccw(c1981.07,774.07) v2@1972.54,765.54 ; 1969,774.07 ccw(c1981.07,774.07) v2@1972.54,765.54 ; 1969,774.07 ccw(c1981.07,774.07) v2@1972.54,765.54 ; KEY2.1@3434.7,415.24 ccw(c3380.87,469.07) 3456.99,469.07 ; KEY2.1@3434.7,415.24 ccw(c3380.87,469.07) 3456.99,469.07 ; KEY2.1@3434.7,415.24 ccw(c3380.87,469.07) 3456.99,469.07 ; KEY2.1@3434.7,415.24 ccw(c3380.87,469.07) 3456.99,469.07 ; KEY2.1@3434.7,415.24 ccw(c3380.87,469.07) 3456.99,469.07 ; KEY2.1@3441.77,408.17 ccw(c3405.01,444.92) 3456.99,444.92 ; KEY2.1@3441.77,408.17 ccw(c3405.01,444.92) 3456.99,444.92 ; KEY2.1@3441.77,408.17 ccw(c3405.01,444.92) 3456.99,444.92 ; KEY2.1@3441.77,408.17 ccw(c3405.01,444.92) 3456.99,444.92 ; KEY2.1@3441.77,408.17 ccw(c3405.01,444.92) 3456.99,444.92 ; R45.2@3449.39,556.15 cw(c3431.04,537.8) 3456.99,537.8 ; R45.2@3449.39,556.15 cw(c3431.04,537.8) 3456.99,537.8 ; R45.2@3449.39,556.15 cw(c3431.04,537.8) 3456.99,537.8 ; R45.2@3449.39,556.15 cw(c3431.04,537.8) 3456.99,537.8 ; R45.2@3449.39,556.15 cw(c3431.04,537.8) 3456.99,537.8 ; R45.2@3449.39,556.15 cw(c3431.04,537.8) 3456.99,537.8 ; R45.2@3449.39,556.15 cw(c3431.04,537.8) 3456.99,537.8 ; R45.2@3449.39,556.15 cw(c3431.04,537.8) 3456.99,537.8 ; 3456.99,430.48 ccw(c3498.54,430.48) KEY2.1@3469.16,401.1 ; 3456.99,430.48 ccw(c3498.54,430.48) KEY2.1@3469.16,401.1 ; 3456.99,430.48 ccw(c3498.54,430.48) KEY2.1@3469.16,401.1 ; 3456.99,430.48 ccw(c3498.54,430.48) KEY2.1@3469.16,401.1 ; 3456.99,430.48 ccw(c3498.54,430.48) KEY2.1@3469.16,401.1 ; 3456.99,454.62 ccw(c3522.68,454.62) KEY2.1@3476.23,408.17 ; 3456.99,454.62 ccw(c3522.68,454.62) KEY2.1@3476.23,408.17 ; 3456.99,454.62 ccw(c3522.68,454.62) KEY2.1@3476.23,408.17 ; 3456.99,454.62 ccw(c3522.68,454.62) KEY2.1@3476.23,408.17 ; 3456.99,454.62 ccw(c3522.68,454.62) KEY2.1@3476.23,408.17 ; 3456.99,478.76 ccw(c3546.82,478.76) KEY2.1@3483.3,415.24 ; 3456.99,478.76 ccw(c3546.82,478.76) KEY2.1@3483.3,415.24 ; 3456.99,478.76 ccw(c3546.82,478.76) KEY2.1@3483.3,415.24 ; 3456.99,478.76 ccw(c3546.82,478.76) KEY2.1@3483.3,415.24 ; 3456.99,478.76 ccw(c3546.82,478.76) KEY2.1@3483.3,415.24 ; 3456.99,537.8 cw(c3482.94,537.8) R45.2@3464.59,556.15 ; 3456.99,537.8 cw(c3482.94,537.8) R45.2@3464.59,556.15 ; 3456.99,537.8 cw(c3482.94,537.8) R45.2@3464.59,556.15 ; 3456.99,537.8 cw(c3482.94,537.8) R45.2@3464.59,556.15 ; 3456.99,537.8 cw(c3482.94,537.8) R45.2@3464.59,556.15 ; 3456.99,537.8 cw(c3482.94,537.8) R45.2@3464.59,556.15 ; 3456.99,537.8 cw(c3482.94,537.8) R45.2@3464.59,556.15 ; 3456.99,537.8 cw(c3482.94,537.8) R45.2@3464.59,556.15 ; R45.2@3464.59,559.4 cw(c3482.94,541.05) 3482.94,567 ; R45.2@3464.59,559.4 cw(c3482.94,541.05) 3482.94,567 ; R45.2@3464.59,559.4 cw(c3482.94,541.05) 3482.94,567 ; R45.2@3464.59,559.4 cw(c3482.94,541.05) 3482.94,567 ; R45.2@3464.59,559.4 cw(c3482.94,541.05) 3482.94,567 ; R45.2@3464.59,559.4 cw(c3482.94,541.05) 3482.94,567 ; R45.2@3464.59,559.4 cw(c3482.94,541.05) 3482.94,567 ; R45.2@3464.59,559.4 cw(c3482.94,541.05) 3482.94,567 ; R45.2@3464.59,574.6 ccw(c3482.94,592.95) 3482.94,567 ; R45.2@3464.59,574.6 ccw(c3482.94,592.95) 3482.94,567 ; R45.2@3464.59,574.6 ccw(c3482.94,592.95) 3482.94,567 ; R45.2@3464.59,574.6 ccw(c3482.94,592.95) 3482.94,567 ; R45.2@3464.59,574.6 ccw(c3482.94,592.95) 3482.94,567 ; R45.2@3464.59,574.6 ccw(c3482.94,592.95) 3482.94,567 ; R45.2@3464.59,574.6 ccw(c3482.94,592.95) 3482.94,567 ; R45.2@3464.59,574.6 ccw(c3482.94,592.95) 3482.94,567 ; 3511.93,567 cw(c3511.93,554.93) v2@3520.46,563.46 ; 3511.93,567 ccw(c3511.93,579.07) v2@3520.46,570.54 ; 3511.93,567 cw(c3511.93,554.93) v2@3520.46,563.46 ; 3511.93,567 ccw(c3511.93,579.07) v2@3520.46,570.54 ; 3511.93,567 cw(c3511.93,554.93) v2@3520.46,563.46 ; 3511.93,567 ccw(c3511.93,579.07) v2@3520.46,570.54 ; 3511.93,567 cw(c3511.93,554.93) v2@3520.46,563.46 ; 3511.93,567 ccw(c3511.93,579.07) v2@3520.46,570.54 ; 3511.93,567 cw(c3511.93,554.93) v2@3520.46,563.46 ; 3511.93,567 ccw(c3511.93,579.07) v2@3520.46,570.54 ; 3511.93,567 cw(c3511.93,554.93) v2@3520.46,563.46 ; 3511.93,567 ccw(c3511.93,579.07) v2@3520.46,570.54 ; 3511.93,567 cw(c3511.93,554.93) v2@3520.46,563.46 ; 3511.93,567 ccw(c3511.93,579.07) v2@3520.46,570.54 ; 3511.93,567 cw(c3511.93,554.93) v2@3520.46,563.46 ; 3511.93,567 ccw(c3511.93,579.07) v2@3520.46,570.54
  Bottom Layer w10: v2@1969,767 v2(1969,762) 1969,457 ccw(c2014,457) 2014,412 3424,412 ccw(c3424,512) 3524,512 v2(3524,567) ; v2@1965.46,758.46 cw(c1956.93,749.93) 1969,749.93 ; v2@1965.46,758.46 cw(c1956.93,749.93) 1969,749.93 ; v2@1965.46,758.46 cw(c1956.93,749.93) 1969,749.93 ; v2@1965.46,758.46 cw(c1956.93,749.93) 1969,749.93 ; v2@1965.46,758.46 cw(c1956.93,749.93) 1969,749.93 ; v2@1965.46,758.46 cw(c1956.93,749.93) 1969,749.93 ; v2@1965.46,758.46 cw(c1956.93,749.93) 1969,749.93 ; v2@1965.46,758.46 cw(c1956.93,749.93) 1969,749.93 ; 1969,749.93 cw(c1981.07,749.93) v2@1972.54,758.46 ; 1969,749.93 cw(c1981.07,749.93) v2@1972.54,758.46 ; 1969,749.93 cw(c1981.07,749.93) v2@1972.54,758.46 ; 1969,749.93 cw(c1981.07,749.93) v2@1972.54,758.46 ; 1969,749.93 cw(c1981.07,749.93) v2@1972.54,758.46 ; 1969,749.93 cw(c1981.07,749.93) v2@1972.54,758.46 ; 1969,749.93 cw(c1981.07,749.93) v2@1972.54,758.46 ; 1969,749.93 cw(c1981.07,749.93) v2@1972.54,758.46 ; v2@3520.46,563.46 cw(c3511.93,554.93) 3524,554.93 ; v2@3520.46,563.46 cw(c3511.93,554.93) 3524,554.93 ; v2@3520.46,563.46 cw(c3511.93,554.93) 3524,554.93 ; v2@3520.46,563.46 cw(c3511.93,554.93) 3524,554.93 ; v2@3520.46,563.46 cw(c3511.93,554.93) 3524,554.93 ; v2@3520.46,563.46 cw(c3511.93,554.93) 3524,554.93 ; v2@3520.46,563.46 cw(c3511.93,554.93) 3524,554.93 ; v2@3520.46,563.46 cw(c3511.93,554.93) 3524,554.93 ; 3524,554.93 cw(c3536.07,554.93) v2@3527.54,563.46 ; 3524,554.93 cw(c3536.07,554.93) v2@3527.54,563.46 ; 3524,554.93 cw(c3536.07,554.93) v2@3527.54,563.46 ; 3524,554.93 cw(c3536.07,554.93) v2@3527.54,563.46 ; 3524,554.93 cw(c3536.07,554.93) v2@3527.54,563.46 ; 3524,554.93 cw(c3536.07,554.93) v2@3527.54,563.46 ; 3524,554.93 cw(c3536.07,554.93) v2@3527.54,563.46 ; 3524,554.93 cw(c3536.07,554.93) v2@3527.54,563.46
LED0: R50.2 U12.42 | length 984.7
  Top Layer w10: R50.2@2260,817.99 2260,852 cw(c2310,852) 2310,902 2387.74,902 ccw(c2387.74,957) 2442.74,957 U12.42@2442.74,1542.79 ; R50.2@2252.4,825.59 ccw(c2234.05,843.94) 2260,843.94 ; R50.2@2252.4,825.59 ccw(c2234.05,843.94) 2260,843.94 ; R50.2@2252.4,825.59 ccw(c2234.05,843.94) 2260,843.94 ; 2260,843.94 ccw(c2285.95,843.94) R50.2@2267.6,825.59 ; 2260,843.94 ccw(c2285.95,843.94) R50.2@2267.6,825.59 ; 2260,843.94 ccw(c2285.95,843.94) R50.2@2267.6,825.59
LED1: R51.2 U12.43 | length 854
  Top Layer w10: U12.43@2462.43,1542.79 2462.43,847.57 ccw(c2495,847.57) 2495,815 ; R51.2@2535,819.99 cw(c2530.01,819.99) 2530.01,815 2495,815 ; 2495,815 ccw(c2495,855.04) 2523.97,827.4 cw(c2495,855.04) 2495,815
LED2: R52.2 U12.44 | length 1112.4
  Top Layer w10: U12.44@2482.11,1542.79 2482.11,1017 ccw(c2582.11,1017) 2582.11,917 2767,917 cw(c2767,875) 2809,875 2809,822.48 ccw(c2811.5,822.48) R52.2@2811.5,819.99 ; R52.2@2800.65,827.59 ccw(c2780.48,847.75) 2809,847.75 ; R52.2@2800.65,827.59 ccw(c2780.48,847.75) 2809,847.75 ; R52.2@2800.65,827.59 ccw(c2780.48,847.75) 2809,847.75 ; 2809,844.12 ccw(c2832.38,844.12) R52.2@2815.85,827.59 ; 2809,844.12 ccw(c2832.38,844.12) R52.2@2815.85,827.59 ; 2809,844.12 ccw(c2832.38,844.12) R52.2@2815.85,827.59
LED3: R53.2 U12.45 | length 1387
  Top Layer w10: U12.45@2501.8,1542.79 2501.8,1042 ccw(c2601.8,1042) 2601.8,942 3049.76,942 cw(c3049.76,881.76) 3110,881.76 R53.2@3110,817.49 ; R53.2@3102.4,825.09 ccw(c3084.05,843.44) 3110,843.44 ; R53.2@3102.4,825.09 ccw(c3084.05,843.44) 3110,843.44 ; R53.2@3102.4,825.09 ccw(c3084.05,843.44) 3110,843.44 ; 3110,843.44 ccw(c3135.95,843.44) R53.2@3117.6,825.09 ; 3110,843.44 ccw(c3135.95,843.44) R53.2@3117.6,825.09 ; 3110,843.44 ccw(c3135.95,843.44) R53.2@3117.6,825.09
NB_RESET: R233.2 U12.82 | length 1609.5
  Top Layer w10: v1(2464,2546) cw(c2464,2527.89) 2482.11,2527.89 U12.82@2482.11,2141.21
  Bottom Layer w10: R233.2@2275,3602.01 cw(c2275,3533.01) 2344,3533.01 2344,2595 ccw(c2393,2595) 2393,2546 v1(2464,2546)
NB_RXD: U5.12 U12.78 | length 1735.3
  Top Layer w10: U5.12@1776.8,3143.61 v1@1872.39,3143.61 ; v1@1914,2676 ccw(c1915,2676) v1(1915,2675) 2487.44,2675 cw(c2487.44,2601.59) 2560.85,2601.59 U12.78@2560.85,2141.21
  Bottom Layer w10: v1(1880,3145) cw(c1880,3110) 1915,3110 v1(1915,2675)
NB_TXD: U5.13 U12.79 | length 1702.4
  Top Layer w10: U5.13@1776.8,3118.02 1857.98,3118.02 cw(c1857.98,3096) 1880,3096 v1(1880,3090) ; v1(1880,2640) 2472.79,2640 cw(c2472.79,2571.63) 2541.17,2571.63 U12.79@2541.17,2141.21
  Bottom Layer w10: v1(1880,2640) v1(1880,3090)
NetC11_2: C11.2 R23.2 RF1.5 | length 1431.9
  Top Layer w10: C11.2@3545,3101.65 ccw(c3546.82,3101.65) C11.2@3546.82,3099.83
  Top Layer w30: R23.2@3377.09,3096.93 3540.28,3096.93 ccw(c3540.28,3101.65) 3545,3101.65 RF1.5@3545,3365 ; R23.2@3373.14,3086.83 cw(c3397.51,3062.46) 3397.51,3096.93 ; R23.2@3373.14,3086.83 cw(c3397.51,3062.46) 3397.51,3096.93 ; R23.2@3373.14,3086.83 cw(c3397.51,3062.46) 3397.51,3096.93 ; R23.2@3373.14,3086.83 cw(c3397.51,3062.46) 3397.51,3096.93 ; R23.2@3373.14,3086.83 cw(c3397.51,3062.46) 3397.51,3096.93 ; R23.2@3373.14,3086.83 cw(c3397.51,3062.46) 3397.51,3096.93 ; R23.2@3373.14,3086.83 cw(c3397.51,3062.46) 3397.51,3096.93 ; R23.2@3373.14,3086.83 cw(c3397.51,3062.46) 3397.51,3096.93 ; RF1.5@3520.81,3335.81 cw(c3462.4,3277.4) 3545,3277.4 ; RF1.5@3520.81,3335.81 cw(c3462.4,3277.4) 3545,3277.4 ; RF1.5@3520.81,3335.81 cw(c3462.4,3277.4) 3545,3277.4 ; RF1.5@3520.81,3335.81 cw(c3462.4,3277.4) 3545,3277.4 ; RF1.5@3520.81,3335.81 cw(c3462.4,3277.4) 3545,3277.4 ; RF1.5@3520.81,3335.81 cw(c3462.4,3277.4) 3545,3277.4 ; 3545,3277.4 cw(c3627.6,3277.4) RF1.5@3569.19,3335.81 ; 3545,3277.4 cw(c3627.6,3277.4) RF1.5@3569.19,3335.81 ; 3545,3277.4 cw(c3627.6,3277.4) RF1.5@3569.19,3335.81 ; 3545,3277.4 cw(c3627.6,3277.4) RF1.5@3569.19,3335.81 ; 3545,3277.4 cw(c3627.6,3277.4) RF1.5@3569.19,3335.81 ; 3545,3277.4 cw(c3627.6,3277.4) RF1.5@3569.19,3335.81
NetC19_2: C19.2 U6.4 | length 82.5
  Top Layer w10: U6.4@1893.29,3534.6 cw(c1895.05,3534.6) 1895.05,3536.35 C19.2@1974.79,3536.35
NetC45_2: C45.2 U12.49 | length 891.3
  Top Layer w10: U12.49@2580.54,1542.79 2580.54,1485.46 ccw(c2609,1485.46) 2609,1457 C45.2@2791.5,1457 ; 2740.8,1457 cw(c2740.8,1406.3) C45.2@2776.65,1442.15 ; 2740.8,1457 ccw(c2740.8,1507.7) C45.2@2776.65,1471.85 ; 2740.8,1457 cw(c2740.8,1406.3) C45.2@2776.65,1442.15 ; 2740.8,1457 ccw(c2740.8,1507.7) C45.2@2776.65,1471.85 ; 2740.8,1457 cw(c2740.8,1406.3) C45.2@2776.65,1442.15 ; 2740.8,1457 ccw(c2740.8,1507.7) C45.2@2776.65,1471.85 ; 2740.8,1457 cw(c2740.8,1406.3) C45.2@2776.65,1442.15 ; 2740.8,1457 ccw(c2740.8,1507.7) C45.2@2776.65,1471.85 ; 2740.8,1457 cw(c2740.8,1406.3) C45.2@2776.65,1442.15 ; 2740.8,1457 ccw(c2740.8,1507.7) C45.2@2776.65,1471.85 ; 2764.94,1457 cw(c2764.94,1430.44) C45.2@2783.72,1449.22 ; 2764.94,1457 ccw(c2764.94,1483.56) C45.2@2783.72,1464.78 ; 2764.94,1457 cw(c2764.94,1430.44) C45.2@2783.72,1449.22 ; 2764.94,1457 ccw(c2764.94,1483.56) C45.2@2783.72,1464.78 ; 2764.94,1457 cw(c2764.94,1430.44) C45.2@2783.72,1449.22 ; 2764.94,1457 ccw(c2764.94,1483.56) C45.2@2783.72,1464.78 ; 2764.94,1457 cw(c2764.94,1430.44) C45.2@2783.72,1449.22 ; 2764.94,1457 ccw(c2764.94,1483.56) C45.2@2783.72,1464.78 ; 2764.94,1457 cw(c2764.94,1430.44) C45.2@2783.72,1449.22 ; 2764.94,1457 ccw(c2764.94,1483.56) C45.2@2783.72,1464.78
NetC46_2: C46.2 U12.73 | length 910.7
  Top Layer w10: U12.73@2663.21,2038.85 2825.85,2038.85 ccw(c2825.85,2087) 2874,2087 2874,2219.5 ccw(c2871.5,2219.5) C46.2@2871.5,2222 ; C46.2@2856.65,2205.15 cw(c2814.77,2163.27) 2874,2163.27 ; C46.2@2856.65,2205.15 cw(c2814.77,2163.27) 2874,2163.27 ; C46.2@2856.65,2205.15 cw(c2814.77,2163.27) 2874,2163.27 ; C46.2@2856.65,2205.15 cw(c2814.77,2163.27) 2874,2163.27 ; C46.2@2856.65,2205.15 cw(c2814.77,2163.27) 2874,2163.27 ; C46.2@2863.72,2212.22 cw(c2838.91,2187.41) 2874,2187.41 ; C46.2@2863.72,2212.22 cw(c2838.91,2187.41) 2874,2187.41 ; C46.2@2863.72,2212.22 cw(c2838.91,2187.41) 2874,2187.41 ; C46.2@2863.72,2212.22 cw(c2838.91,2187.41) 2874,2187.41 ; C46.2@2863.72,2212.22 cw(c2838.91,2187.41) 2874,2187.41 ; 2874,2175.34 cw(c2916.16,2175.34) C46.2@2886.35,2205.15 ; 2874,2175.34 cw(c2916.16,2175.34) C46.2@2886.35,2205.15 ; 2874,2175.34 cw(c2916.16,2175.34) C46.2@2886.35,2205.15 ; 2874,2175.34 cw(c2916.16,2175.34) C46.2@2886.35,2205.15 ; 2874,2175.34 cw(c2916.16,2175.34) C46.2@2886.35,2205.15
NetC47_2: C47.2 U12.13 Y1.2 | length 3754
  Top Layer w10: Y1.2@1479,1652 C47.2@1666.5,1652 1666.5,1742 cw(c1766.5,1742) 1766.5,1842 U12.13@2064.79,1842 ; Y1.2@1482.09,1633.91 cw(c1525.76,1590.24) 1525.76,1652 ; Y1.2@1482.09,1633.91 cw(c1525.76,1590.24) 1525.76,1652 ; Y1.2@1482.09,1633.91 cw(c1525.76,1590.24) 1525.76,1652 ; Y1.2@1482.09,1633.91 cw(c1525.76,1590.24) 1525.76,1652 ; Y1.2@1482.09,1633.91 cw(c1525.76,1590.24) 1525.76,1652 ; Y1.2@1489.16,1626.84 cw(c1549.91,1566.09) 1549.91,1652 ; Y1.2@1489.16,1626.84 cw(c1549.91,1566.09) 1549.91,1652 ; Y1.2@1489.16,1626.84 cw(c1549.91,1566.09) 1549.91,1652 ; Y1.2@1489.16,1626.84 cw(c1549.91,1566.09) 1549.91,1652 ; Y1.2@1489.16,1626.84 cw(c1549.91,1566.09) 1549.91,1652 ; Y1.2@1496.23,1619.77 cw(c1574.05,1541.95) 1574.05,1652 ; Y1.2@1496.23,1619.77 cw(c1574.05,1541.95) 1574.05,1652 ; Y1.2@1496.23,1619.77 cw(c1574.05,1541.95) 1574.05,1652 ; Y1.2@1496.23,1619.77 cw(c1574.05,1541.95) 1574.05,1652 ; Y1.2@1496.23,1619.77 cw(c1574.05,1541.95) 1574.05,1652 ; Y1.2@1503.3,1612.7 cw(c1598.19,1517.81) 1598.19,1652 ; Y1.2@1503.3,1612.7 cw(c1598.19,1517.81) 1598.19,1652 ; Y1.2@1503.3,1612.7 cw(c1598.19,1517.81) 1598.19,1652 ; Y1.2@1503.3,1612.7 cw(c1598.19,1517.81) 1598.19,1652 ; Y1.2@1503.3,1612.7 cw(c1598.19,1517.81) 1598.19,1652 ; Y1.2@1503.3,1661.3 ccw(c1525.76,1683.76) 1525.76,1652 ; Y1.2@1503.3,1661.3 ccw(c1525.76,1683.76) 1525.76,1652 ; Y1.2@1503.3,1661.3 ccw(c1525.76,1683.76) 1525.76,1652 ; Y1.2@1503.3,1661.3 ccw(c1525.76,1683.76) 1525.76,1652 ; Y1.2@1503.3,1661.3 ccw(c1525.76,1683.76) 1525.76,1652 ; Y1.2@1513.18,1633.44 cw(c1528.36,1631.85) 1520.73,1645.07 ; Y1.2@1513.18,1633.44 cw(c1528.36,1631.85) 1520.73,1645.07 ; Y1.2@1513.18,1633.44 cw(c1528.36,1631.85) 1520.73,1645.07 ; Y1.2@1513.18,1633.44 cw(c1528.36,1631.85) 1520.73,1645.07 ; Y1.2@1513.18,1633.44 cw(c1528.36,1631.85) 1520.73,1645.07 ; Y1.2@1513.18,1633.44 cw(c1528.36,1631.85) 1520.73,1645.07 ; Y1.2@1513.18,1633.44 cw(c1528.36,1631.85) 1520.73,1645.07 ; Y1.2@1513.18,1633.44 cw(c1528.36,1631.85) 1520.73,1645.07 ; Y1.2@1513.18,1633.44 cw(c1528.36,1631.85) 1520.73,1645.07 ; Y1.2@1513.18,1633.44 cw(c1528.36,1631.85) 1520.73,1645.07 ; 1615.8,1652 cw(c1615.8,1601.3) C47.2@1651.65,1637.15 ; 1615.8,1652 ccw(c1615.8,1702.7) C47.2@1651.65,1666.85 ; 1615.8,1652 cw(c1615.8,1601.3) C47.2@1651.65,1637.15 ; 1615.8,1652 ccw(c1615.8,1702.7) C47.2@1651.65,1666.85 ; 1615.8,1652 cw(c1615.8,1601.3) C47.2@1651.65,1637.15 ; 1615.8,1652 ccw(c1615.8,1702.7) C47.2@1651.65,1666.85 ; 1615.8,1652 cw(c1615.8,1601.3) C47.2@1651.65,1637.15 ; 1615.8,1652 ccw(c1615.8,1702.7) C47.2@1651.65,1666.85 ; 1615.8,1652 cw(c1615.8,1601.3) C47.2@1651.65,1637.15 ; 1615.8,1652 ccw(c1615.8,1702.7) C47.2@1651.65,1666.85 ; 1639.94,1652 cw(c1639.94,1625.44) C47.2@1658.72,1644.22 ; 1639.94,1652 ccw(c1639.94,1678.56) C47.2@1658.72,1659.78 ; 1639.94,1652 cw(c1639.94,1625.44) C47.2@1658.72,1644.22 ; 1639.94,1652 ccw(c1639.94,1678.56) C47.2@1658.72,1659.78 ; 1639.94,1652 cw(c1639.94,1625.44) C47.2@1658.72,1644.22 ; 1639.94,1652 ccw(c1639.94,1678.56) C47.2@1658.72,1659.78 ; 1639.94,1652 cw(c1639.94,1625.44) C47.2@1658.72,1644.22 ; 1639.94,1652 ccw(c1639.94,1678.56) C47.2@1658.72,1659.78 ; 1639.94,1652 cw(c1639.94,1625.44) C47.2@1658.72,1644.22 ; 1639.94,1652 ccw(c1639.94,1678.56) C47.2@1658.72,1659.78 ; C47.2@1651.65,1668.85 ccw(c1615.8,1704.7) 1666.5,1704.7 ; C47.2@1651.65,1668.85 ccw(c1615.8,1704.7) 1666.5,1704.7 ; C47.2@1651.65,1668.85 ccw(c1615.8,1704.7) 1666.5,1704.7 ; C47.2@1651.65,1668.85 ccw(c1615.8,1704.7) 1666.5,1704.7 ; C47.2@1651.65,1668.85 ccw(c1615.8,1704.7) 1666.5,1704.7 ; C47.2@1658.72,1661.78 ccw(c1639.94,1680.56) 1666.5,1680.56 ; C47.2@1658.72,1661.78 ccw(c1639.94,1680.56) 1666.5,1680.56 ; C47.2@1658.72,1661.78 ccw(c1639.94,1680.56) 1666.5,1680.56 ; C47.2@1658.72,1661.78 ccw(c1639.94,1680.56) 1666.5,1680.56 ; C47.2@1658.72,1661.78 ccw(c1639.94,1680.56) 1666.5,1680.56 ; 1666.5,1680.56 ccw(c1693.06,1680.56) C47.2@1674.28,1661.78 ; 1666.5,1680.56 ccw(c1693.06,1680.56) C47.2@1674.28,1661.78 ; 1666.5,1680.56 ccw(c1693.06,1680.56) C47.2@1674.28,1661.78 ; 1666.5,1680.56 ccw(c1693.06,1680.56) C47.2@1674.28,1661.78 ; 1666.5,1680.56 ccw(c1693.06,1680.56) C47.2@1674.28,1661.78 ; 1666.5,1704.7 ccw(c1717.2,1704.7) C47.2@1681.35,1668.85 ; 1666.5,1704.7 ccw(c1717.2,1704.7) C47.2@1681.35,1668.85 ; 1666.5,1704.7 ccw(c1717.2,1704.7) C47.2@1681.35,1668.85 ; 1666.5,1704.7 ccw(c1717.2,1704.7) C47.2@1681.35,1668.85 ; 1666.5,1704.7 ccw(c1717.2,1704.7) C47.2@1681.35,1668.85